# Altium PCB F1_Adapterboard.PcbDoc
Units mil, origin at the board's own origin, x right, y up, seen from the top; angles counter-clockwise.
Board outline 3725 x 3690 mil, 4 copper layers (Top Layer, Mid-Layer 1, Mid-Layer 2, Bottom Layer); 9 components, 93 nets, 198 pads, 8 vias.
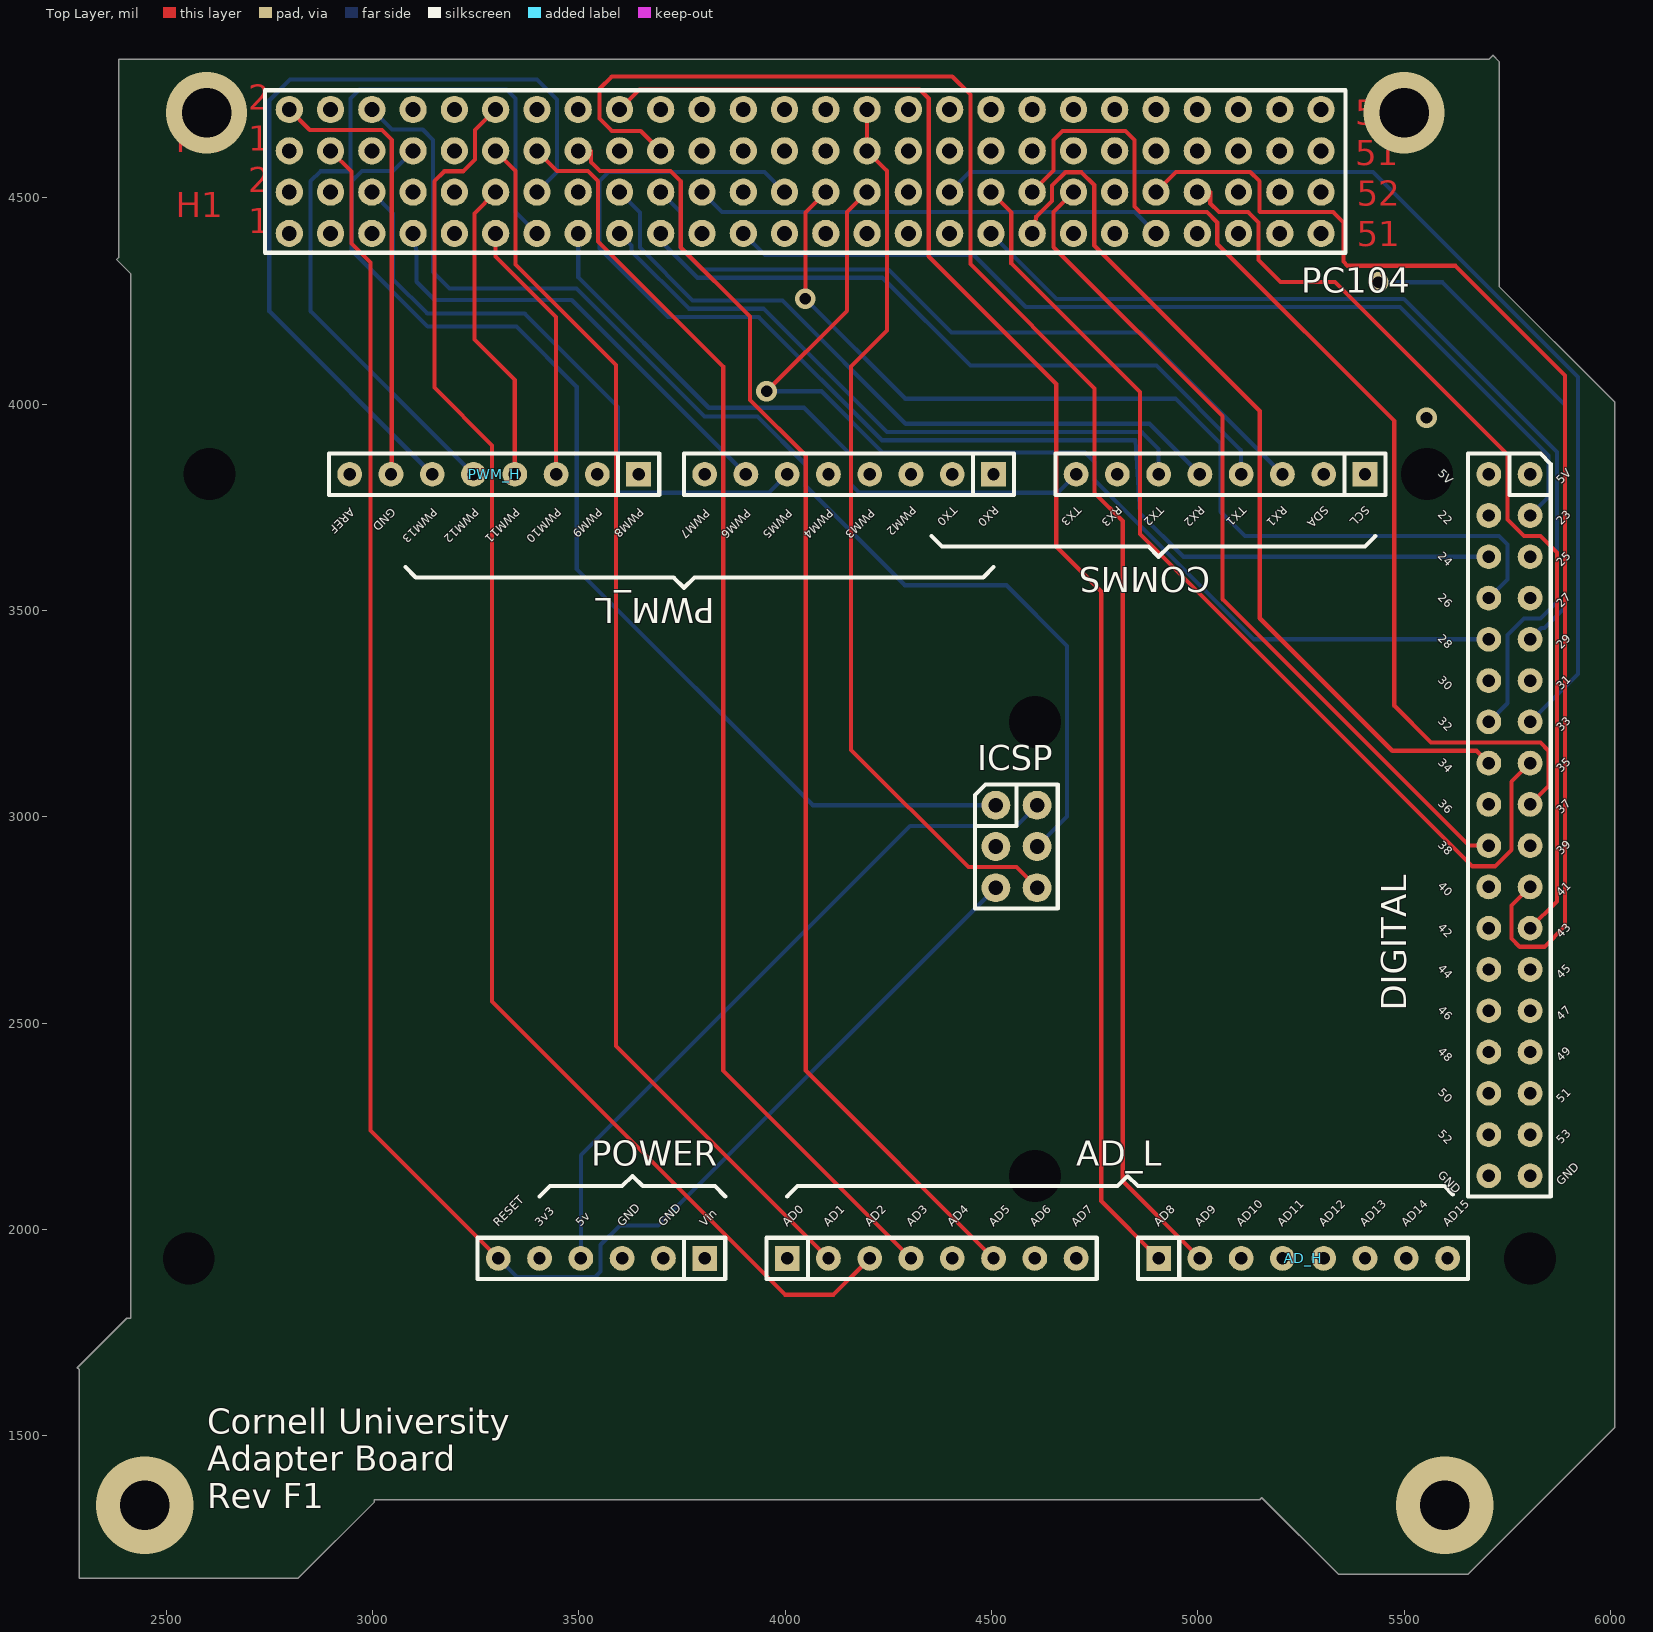
[diagram p0: Top Layer view]
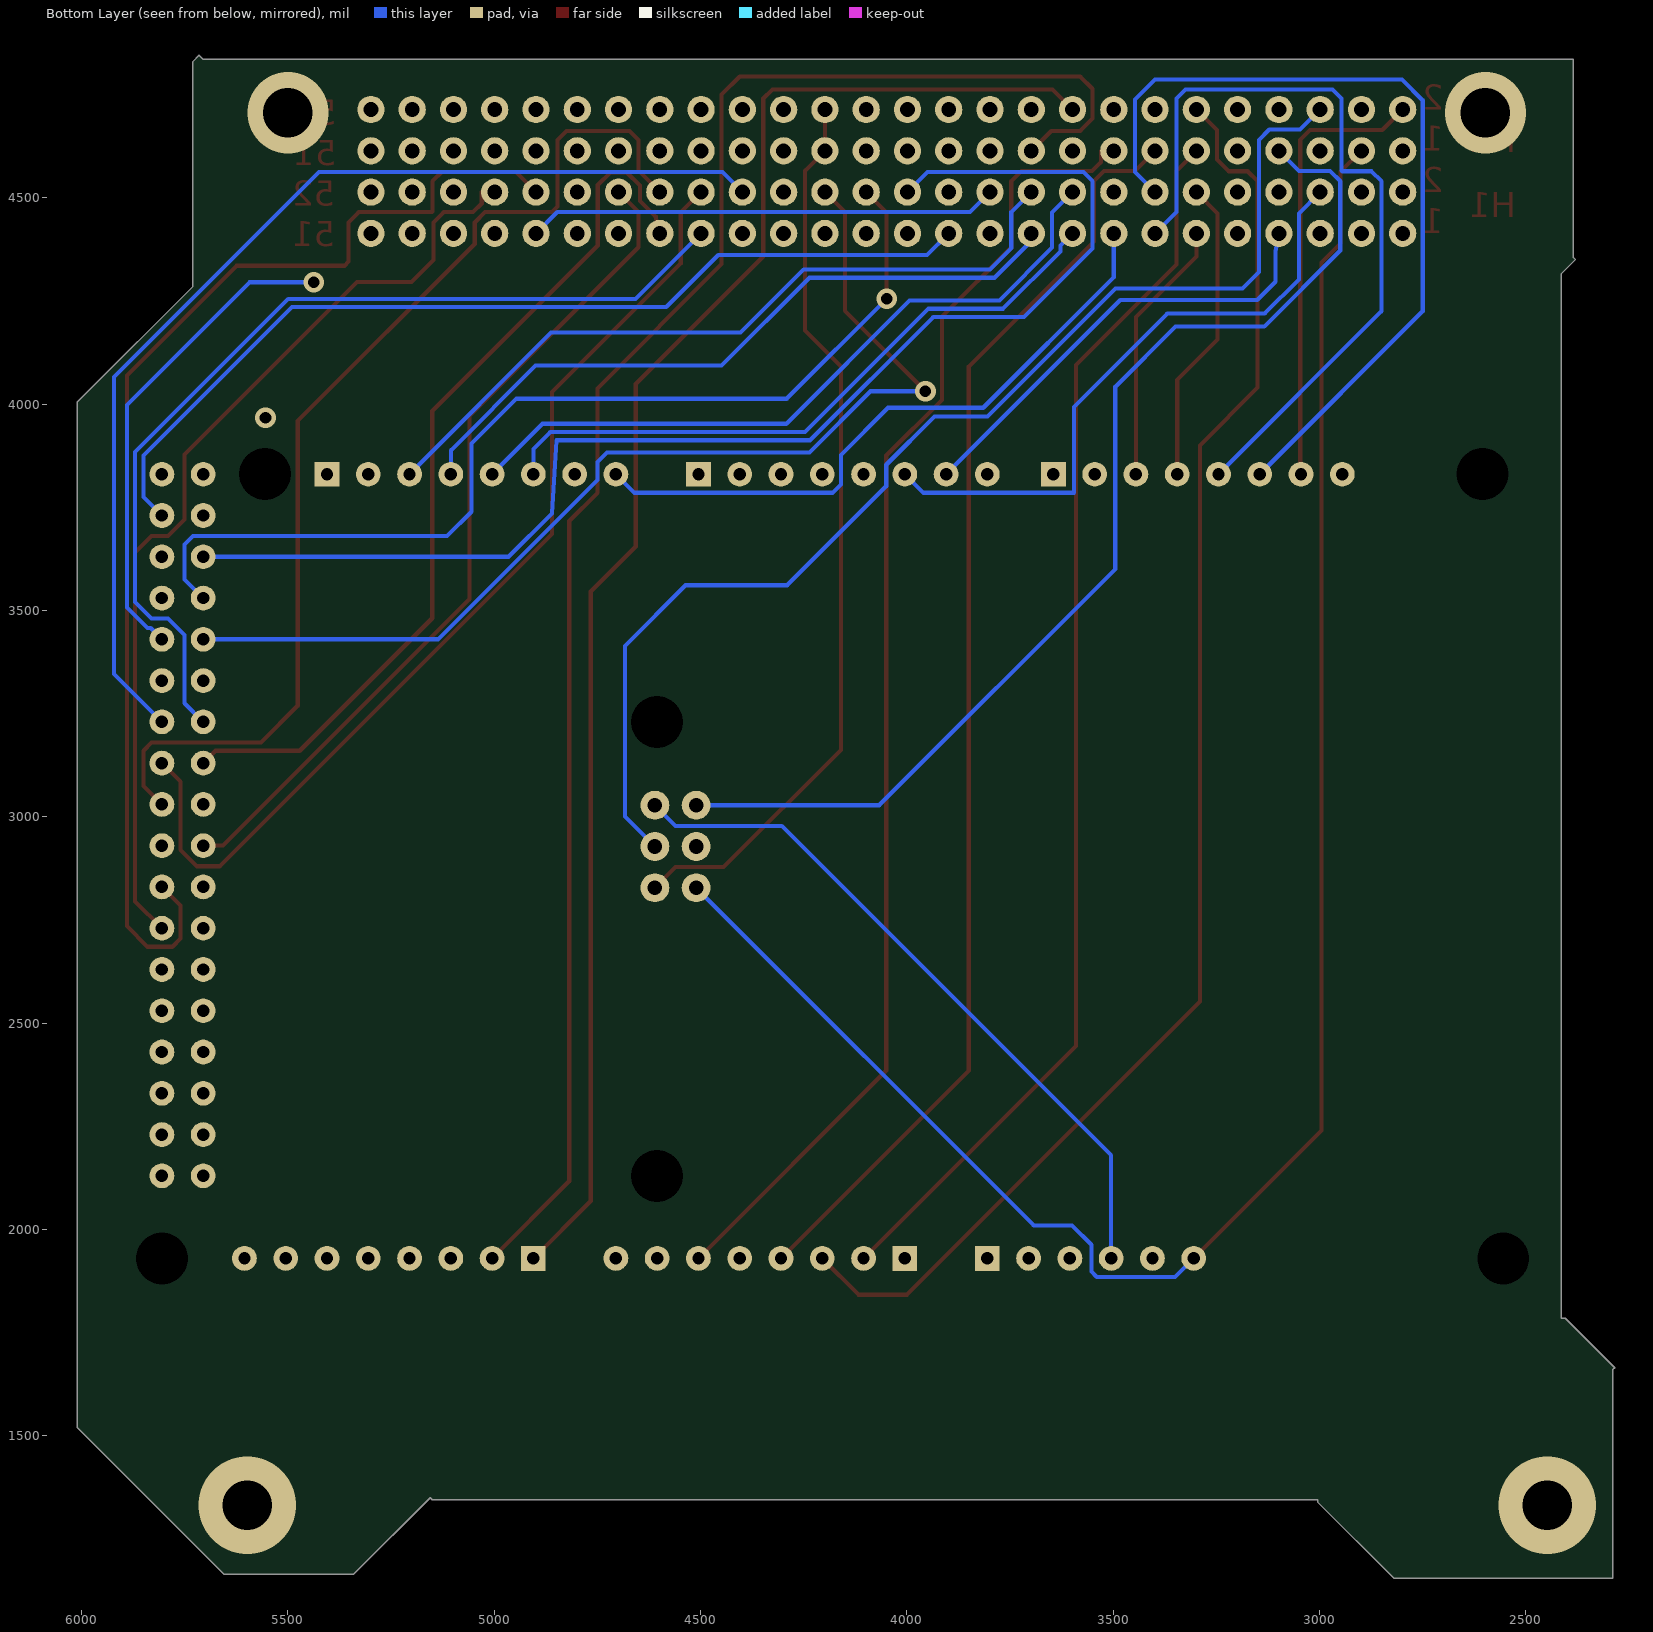
[diagram p1: Bottom Layer view, seen from below]
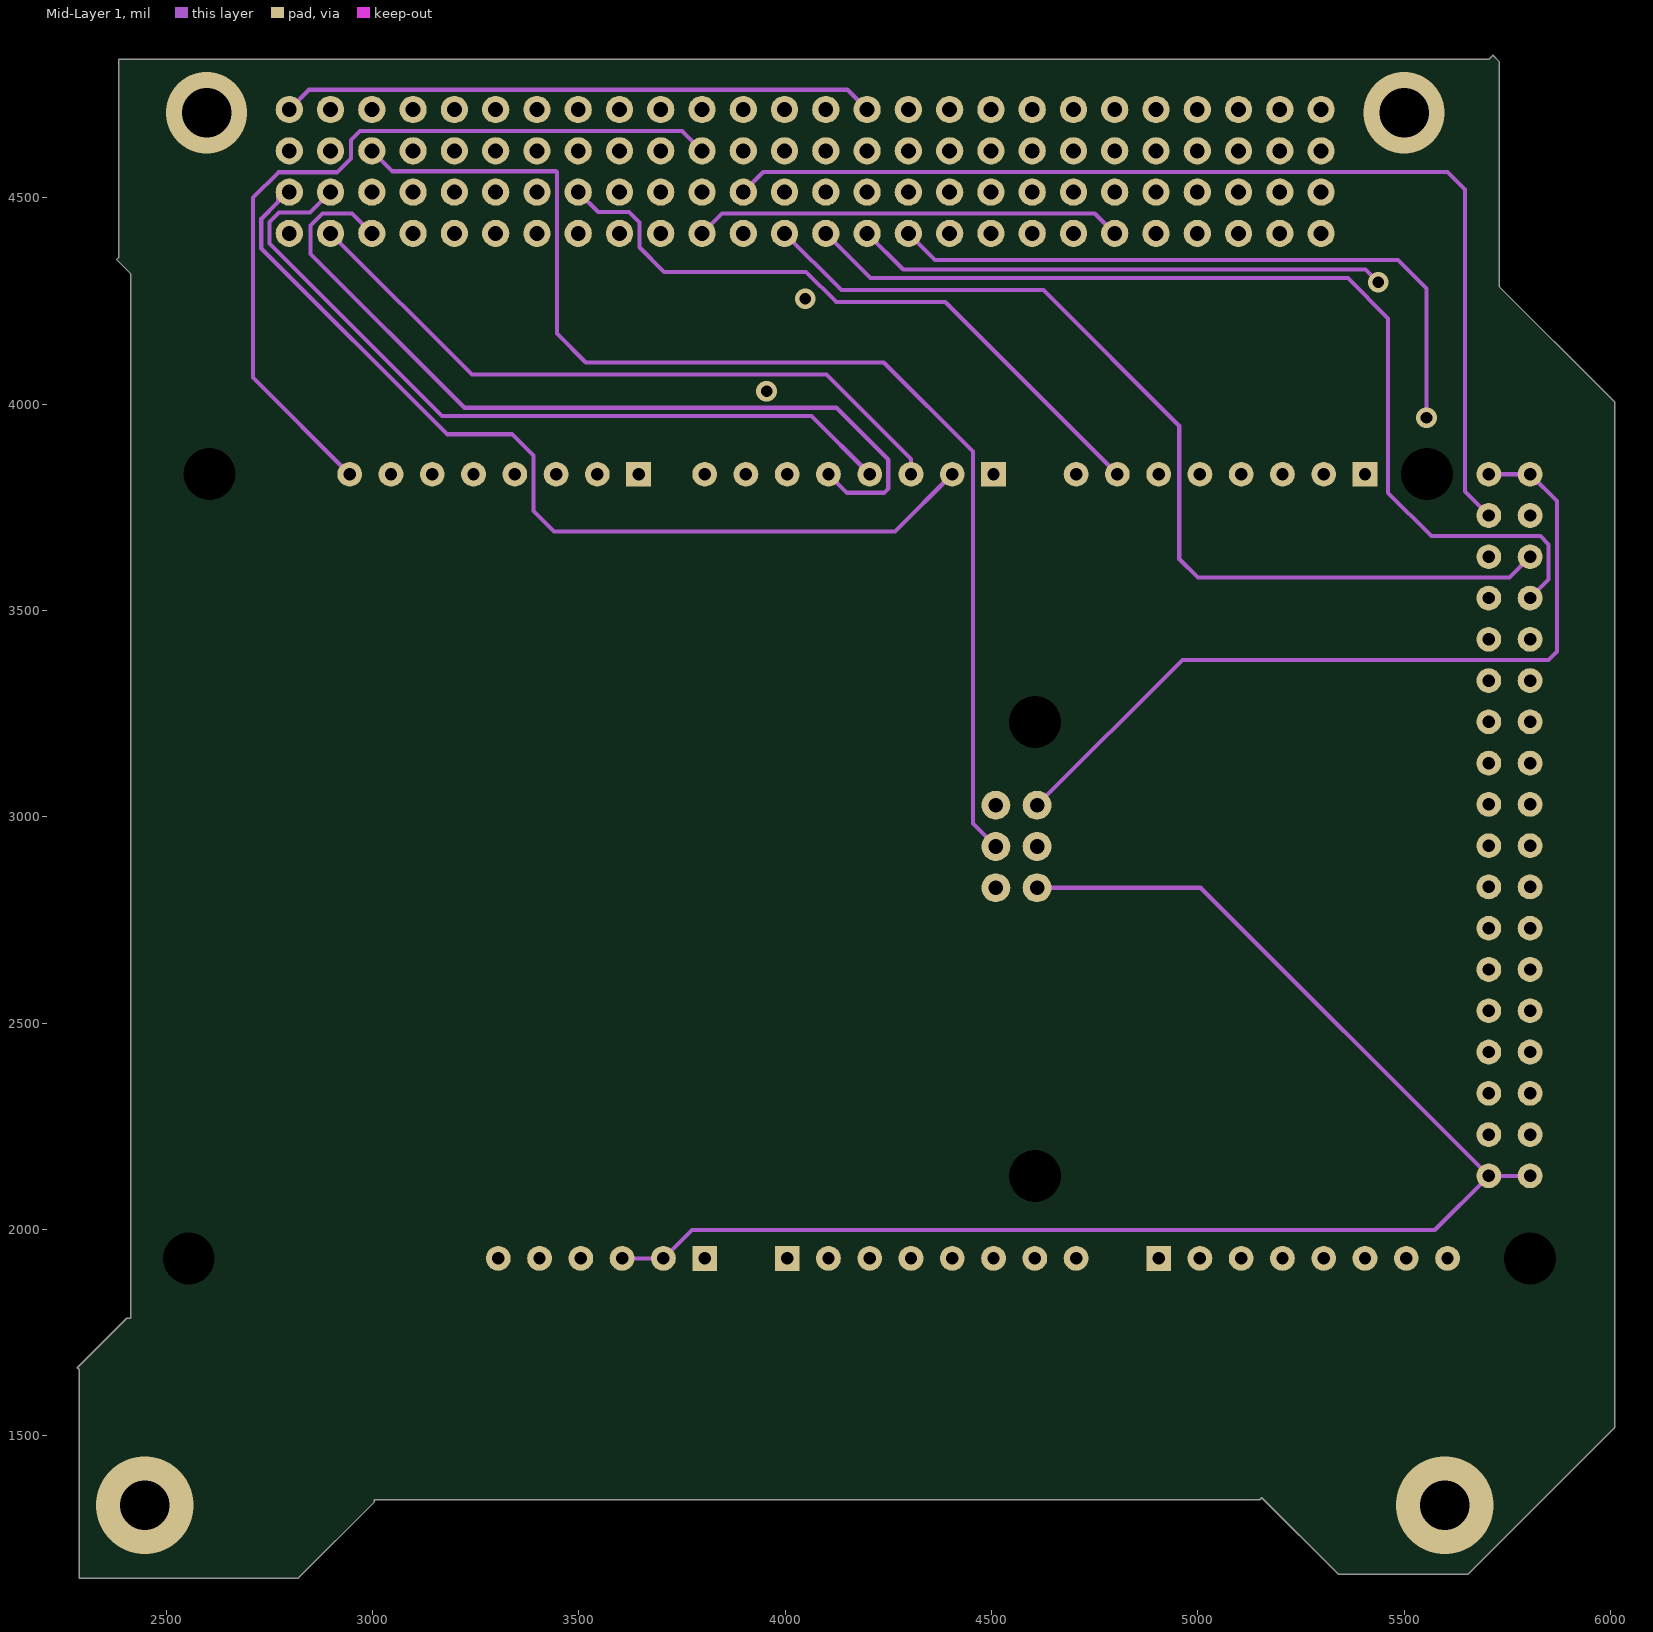
[diagram p2: Mid-Layer 1]
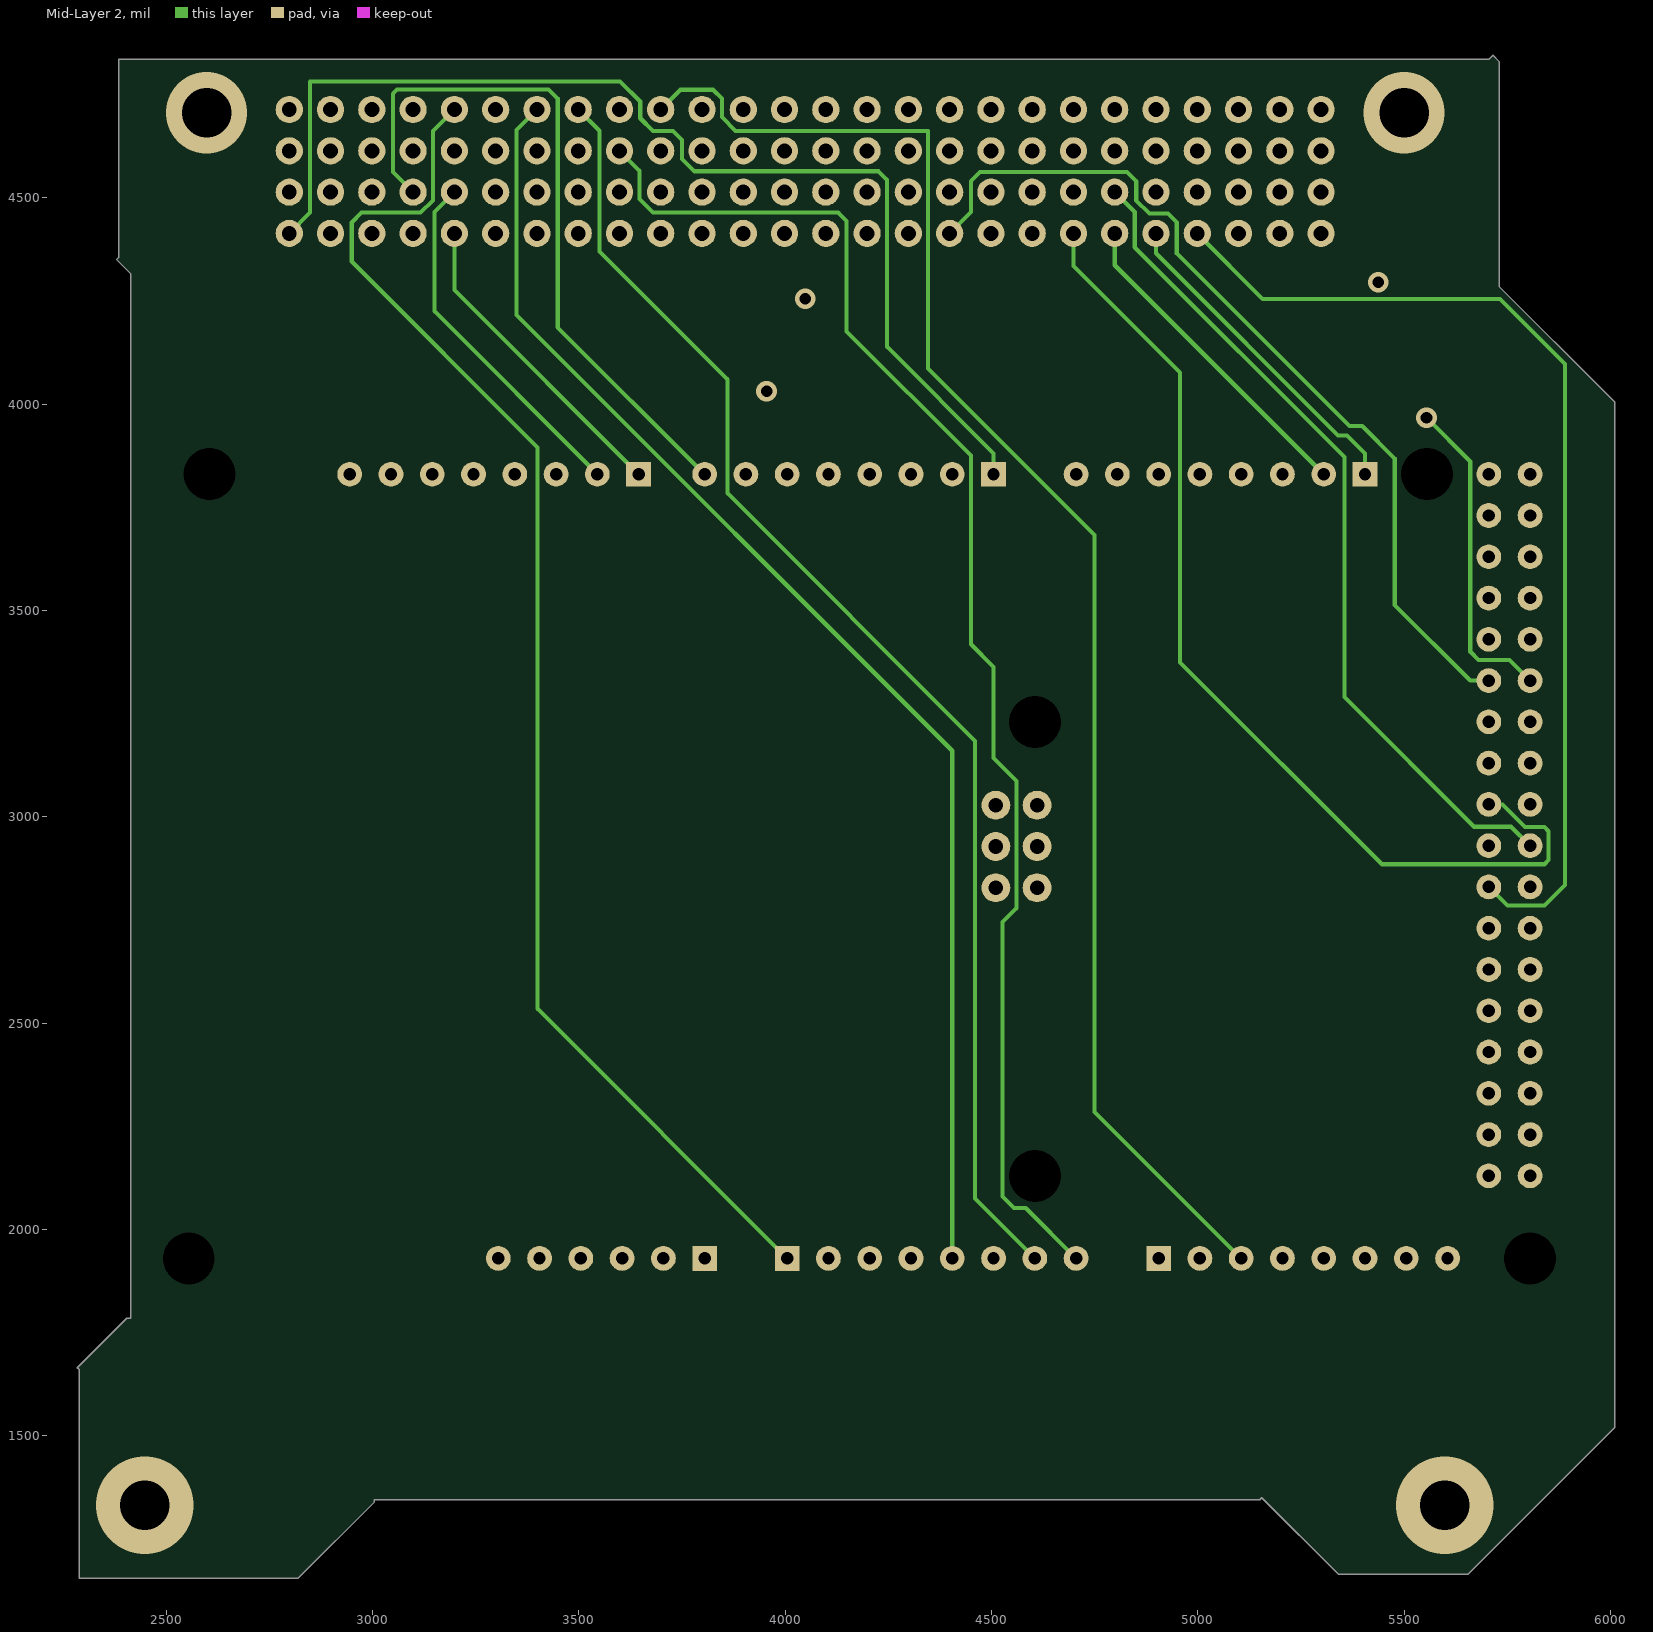
[diagram p3: Mid-Layer 2]
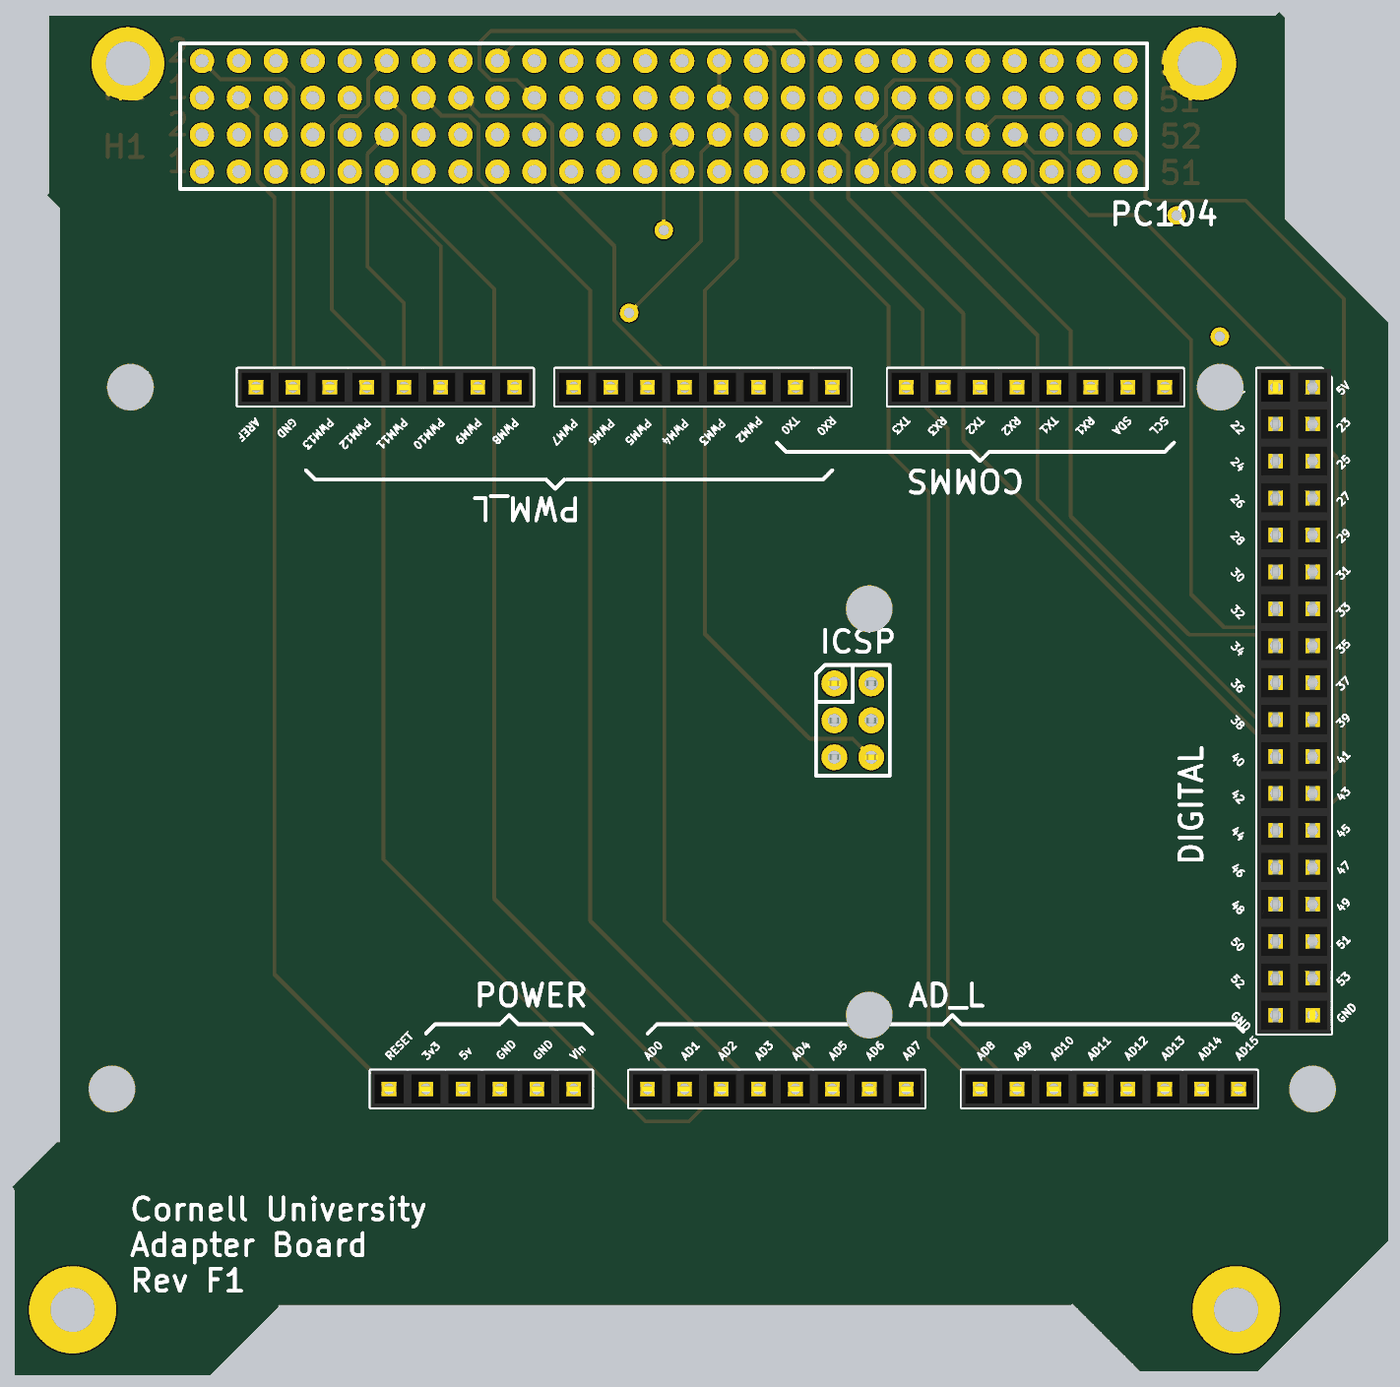
[diagram p4: 3D render of the assembled board from above, using the file's embedded part models]

## Layer stack, top to bottom
Top Solder: solder mask 0.4, Solder Resist, Dk 3.5
Top Layer: signal copper 1.4
Dielectric 1: dielectric 12.6, FR-4, Dk 4.8
Mid-Layer 1: signal copper 1.4
Dielectric2: dielectric 12.6, FR-4, Dk 4.8
Mid-Layer 2: signal copper 1.4
Dielectric3: dielectric 12.6, FR-4, Dk 4.8
Bottom Layer: signal copper 1.4
Bottom Solder: solder mask 0.4, Solder Resist, Dk 3.5

## Board outline
2385,4835 2385,4355 2380,4350 2415,4315 2415,1785 2405,1785 2285,1665 2290,1660 2290,1155 2820,1155 3005,1340 3005,1345 5150,1345 5155,1350 5340,1165 5350,1165 5655,1165 5660,1170 6010,1520 6010,1670 6010,4005 5995,4020 5730,4285 5730,4380 5730,4830 5715,4845 5705,4835 2390,4835

## Design rules (kind name [scope] priority, off if disabled: settings)
Clearance [All] p1: gap=10
PolygonConnect [All] p1: connectstyle=Relief reliefconductorwidth=10 reliefentries=4 polygonreliefangle="90 Angle" airgapwidth=10
RoutingVias [All] p1: holewidth=28 width=50 viastyle="Through Hole" minholewidth=28 minwidth=50 maxholewidth=28 maxwidth=50
SolderMaskExpansion [All] p1: expansion=4
Width [All] p1: maxlimit=10 minlimit=10 preferedwidth=10
30 further rules are at their usual default settings.

## Components (designator, comment, footprint, x,y, rotation, side; value= is the part's Value field where it differs from the comment)
AD_H "AD_H" "Header 8x1 8.5mm" 4905,1930 r0 top locked
AD_L "AD_L" "Header 8x1 8.5mm" 4005,1930 r0 top locked
COMMS "Communication" "Header 8x1 8.5mm" 5405,3830 r180 top
DIGITAL "IO_36" "HEADER 36X 8MM" 5805,3830 r270 top locked
ICSP "ICSP" ICSP 4510.51,3028.03 r0 top locked
PC104 "PC-104" PC-104FOOTPRINT 2798.61,4413.55 r0 top
POWER "POWER" "Header 6x1 8.5mm" 3805,1930 r180 top locked
PWM_H "PWM_H" "Header 8x1 8.5mm" 3645,3830 r180 top locked
PWM_L "PWM_L" "Header 8x1 8.5mm" 4505,3830 r180 top locked

## Footprints (in the part's own frame and the unit in brackets; to place one, negate y for a bottom-side part, rotate by r counter-clockwise, add the part's x,y. Pads: shape width x height; smd on the part's side, far side on the other; paste and mask are expansions set on the pad)
"Header 6x1 8.5mm" [mil] "Stackable 6 pin header"
  rect 60x60 hole 30: 1(0,0)
  round 60 hole 30: 2(100,0) 3(200,0) 4(300,0) 5(400,0) 6(500,0)
  silkscreen extent -50,-50 550,50, body extent -50,-50 550,50, height 335
"Header 8x1 8.5mm" [mil] "Stackable 8 pin header"
  rect 60x60 hole 30: 1(0,0)
  round 60 hole 30: 2(100,0) 3(200,0) 4(300,0) 5(400,0) 6(500,0) 7(600,0) 8(700,0)
  silkscreen extent -50,-50 750,50, body extent -50,-50 750,50, height 335
"HEADER 36X 8MM" [mil] "Stackable 10 pin header"
  round 60 hole 30: 1(0,0) 2(0,-100) 3(100,0) 4(100,-100) 5(200,0) 6(200,-100) 7(300,0) 8(300,-100) 9(400,0) 10(400,-100) 11(500,0) 12(500,-100) 13(600,0) 14(600,-100) 15(700,0) 16(700,-100) 17(800,0) 18(800,-100) 19(900,-100) 20(900,0) 21(1000,0) 22(1000,-100) 23(1100,0) 24(1100,-100) 25(1200,0) 26(1200,-100) 27(1300,0) 28(1300,-100) 29(1400,0) 30(1400,-100) 31(1500,0) 32(1500,-100) 33(1600,0) 34(1600,-100) 35(1700,0) 36(1700,-100)
  silkscreen extent -50,-150 1750,50, body extent -50,-150 1750,50, height 335
ICSP [mil]
  round 70 hole 35.43: 1(0,0) 2(100,0) 3(0,-100) 4(100,-100) 5(0,-200) 6(100,-200)
  silkscreen extent -50,-250 150,50, body extent -50,-250 150,50, height 485
PC-104FOOTPRINT [mil] "ESQ-126-14-G-D"
  round 65.98 hole 35.98 mask+2.99: H1_1(0,0) H1_2(0,100) H1_3(100,0) H1_4(100,100) H1_5(200,0) H1_6(200,100) H1_7(300,0) H1_8(300,100) H1_9(400,0) H1_10(400,100) H1_11(500,0) H1_12(500,100) H1_13(600,0) H1_14(600,100) H1_15(700,0) H1_16(700,100) H1_17(800,0) H1_18(800,100) H1_19(900,0) H1_20(900,100) H1_21(1000,0) H1_22(1000,100) H1_23(1100,0) H1_24(1100,100) H1_25(1200,0) H1_26(1200,100) H1_27(1300,0) H1_28(1300,100) H1_29(1400,0) H1_30(1400,100) H1_31(1500,0) H1_32(1500,100) H1_33(1600,0) H1_34(1600,100) H1_35(1700,0) H1_36(1700,100) H1_37(1800,0) H1_38(1800,100) H1_39(1900,0) H1_40(1900,100) H1_41(2000,0) H1_42(2000,100) H1_43(2100,0) H1_44(2100,100) H1_45(2200,0) H1_46(2200,100) H1_47(2300,0) H1_48(2300,100) H1_49(2400,0) H1_50(2400,100) H1_51(2500,0) H1_52(2500,100) H2_1(0,200) H2_2(0,300) H2_3(100,200) H2_4(100,300) H2_5(200,200) H2_6(200,300) H2_7(300,200) H2_8(300,300) H2_9(400,200) H2_10(400,300) H2_11(500,200) H2_12(500,300) H2_13(600,200) H2_14(600,300) H2_15(700,200) H2_16(700,300) H2_17(800,200) H2_18(800,300) H2_19(900,200) H2_20(900,300) H2_21(1000,200) H2_22(1000,300) H2_23(1100,200) H2_24(1100,300) H2_25(1200,200) H2_26(1200,300) H2_27(1300,200) H2_28(1300,300) H2_29(1400,200) H2_30(1400,300) H2_31(1500,200) H2_32(1500,300) H2_33(1600,200) H2_34(1600,300) H2_35(1700,200) H2_36(1700,300) H2_37(1800,200) H2_38(1800,300) H2_39(1900,200) H2_40(1900,300) H2_41(2000,200) H2_42(2000,300) H2_43(2100,200) H2_44(2100,300) H2_45(2200,200) H2_46(2200,300) H2_47(2300,200) H2_48(2300,300) H2_49(2400,200) H2_50(2400,300) H2_51(2500,200) H2_52(2500,300)
  silkscreen extent -59,-47 2559,347

## Free pads (board coordinates)
  round 62.99 hole 125.98: 0(2555,1930) 0(2605,3830) 0(4605,2130) 0(4605,3230) 0(5555,3830) 0(5805,1930)

## Via types
v1: diameter 50, hole 28, Top Layer to Bottom Layer, 4 vias
v2: diameter 196.85, hole 120, Top Layer to Bottom Layer, 2 vias
v3: diameter 236.22, hole 120, Top Layer to Bottom Layer, 2 vias

## Nets (pads, with @x,y where several pads share a name; then routed paths per layer and width w, separated by ;. In a path a pad name is that pad's centre, name@x,y a point inside that pad or via, vN(x,y) a via of type N, cw(c..) or ccw(c..) an arc to the next point about the centre after c; other vN are vias at no path point)
3V3: POWER.5
3V3_1: PC104.H2_27
3V3_2: PC104.H2_28
3V3_3: PC104.H1_52
5V: DIGITAL.1 DIGITAL.2 ICSP.2 POWER.4 | length 3677.3
  Mid-Layer 1 w10: ICSP.2 4962.48,3380 5850,3380 5870,3400 5870,3765 DIGITAL.1 DIGITAL.2
  Bottom Layer w10: POWER.4 3505,2180 4303.03,2978.03 4560.51,2978.03 ICSP.2
5V_1: PC104.H2_25
5V_2: PC104.H2_26
5V_3: PC104.H1_47
5V_4: PC104.H1_48
5V_5: PC104.H1_49
5V_6: PC104.H1_50
5V_7: PC104.H1_51
5V_IN: PC104.H1_32
AD0: AD_L.1 PC104.H2_10 | length 3407.3
  Mid-Layer 2 w10: PC104.H2_10 3146.6,4661.55 3146.6,4493.67 3116.93,4464 2974,4464 2950,4440 2950,4345 3400,3895 3400,2535 AD_L.1
AD1: AD_L.2 PC104.H2_11 | length 3017.6
  Top Layer w10: PC104.H2_11 3347,4565.16 3347,4338 3590,4095 3590,2445 AD_L.2
AD2: AD_L.3 PC104.H2_12 | length 3553.6
  Top Layer w10: PC104.H2_12 3249,4663.94 3249,4593 3220,4564 3174,4564 3150,4540 3150,4040 3290,3900 3290,2552 4000,1842 4117,1842 AD_L.3
AD3: AD_L.4 PC104.H2_13 | length 3102.8
  Top Layer w10: PC104.H2_13 3447.16,4565 3522,4565 3547,4540 3547,4394 3850,4091 3850,2385 AD_L.4
AD4: AD_L.5 PC104.H2_14 | length 3241.5
  Mid-Layer 2 w10: PC104.H2_14 3349,4663.94 3349,4216 4405,3160 AD_L.5
AD5: AD_L.6 PC104.H2_15 | length 3219
  Top Layer w10: PC104.H2_15 3530,4613.55 3530,4586 3551,4565 3722,4565 3747,4540 3747,4380 3915,4212 3915,4010 4050,3875 4050,2385 AD_L.6
AD6: AD_L.7 PC104.H2_16 | length 3241.8
  Mid-Layer 2 w10: PC104.H2_16 3550,4662.16 3550,4370 3860,4060 3860,3784 4460,3184 4460,2075 AD_L.7
AD7: AD_L.8 PC104.H2_17 | length 3448.8
  Mid-Layer 2 w10: PC104.H2_17 3647,4565.16 3647,4497 3680,4464 4128.61,4464 4149,4443.61 4149,4176 4450,3875 4450,3418 4505,3363 4505,3142.51 4560.51,3087 4560.51,2778.51 4527,2745 4527,2080 4555,2052 4583,2052 AD_L.8
AD8: AD_H.1 PC104.H2_18 | length 3819.3
  Top Layer w10: PC104.H2_18 3647.06,4762 4326,4762 4348,4740 4348,4358 4657,4049 4657,3655 4766,3546 4766,2069 AD_H.1
AD9: AD_H.2 PC104.H2_19 | length 4233.1
  Top Layer w10: PC104.H2_19 3650.16,4662 3580,4662 3550,4692 3550,4764 3580,4794 4405,4794 4449,4750 4449,4339 4750,4038 4750,3785 4818,3717 4818,2117 AD_H.2
AD10: AD_H.3 PC104.H2_20 | length 3781.1
  Mid-Layer 2 w10: PC104.H2_20 3746.6,4761.55 3825.06,4761.55 3846.6,4740 3846.6,4695.4 3880,4662 4346.15,4662 4346.6,4661.55 4346.6,4086.4 4750,3683 4750,2285 AD_H.3
AD11: AD_H.4
AD12: AD_H.5
AD13: AD_H.6
AD14: AD_H.7
AD15: AD_H.8
AGND: PC104.H2_31
AREF: PC104.H2_21 PWM_H.8 | length 1968.2
  Mid-Layer 1 w10: PWM_H.8 2710.62,4064.38 2710.62,4500 2772.16,4561.55 2914.48,4561.55 2948,4595.07 2948,4640 2969.55,4661.55 3750.62,4661.55 PC104.H2_21
GND: DIGITAL.35 DIGITAL.36 ICSP.6 PC104.H2_2 PC104.H2_29 PC104.H2_30 POWER.2 POWER.3 PWM_H.7 | length 8393.6
  Top Layer w10: PC104.H2_2 2848.16,4664 3023,4664 3047,4640 3047,3830 PWM_H.7 ; PC104.H2_30 PC104.H2_29 4247,4565.16 4247,4178 4160,4091 4160,3162 4443.97,2878.03 4560.51,2878.03 ICSP.6
  Mid-Layer 1 w10: PC104.H2_2 2846.6,4761.55 4150.62,4761.55 PC104.H2_30 ; POWER.3 POWER.2 3774,1999 5574,1999 DIGITAL.36 ; ICSP.6 5006.97,2828.03 DIGITAL.36 ; DIGITAL.35 DIGITAL.36
IO22: DIGITAL.3 PC104.H1_23 | length 2338.1
  Bottom Layer w10: PC104.H1_23 3951.16,4361 4457,4361 4583,4235 5490,4235 5850,3875 5850,3775 DIGITAL.3
IO23: DIGITAL.4 PC104.H1_24 | length 2599.9
  Mid-Layer 1 w10: PC104.H1_24 3947.06,4562 5605,4562 5647,4520 5647,3788 DIGITAL.4
IO24: DIGITAL.5 PC104.H1_25 | length 2361
  Mid-Layer 1 w10: PC104.H1_25 4136.16,4276 4626,4276 4955,3947 4955,3625 5000,3580 5755,3580 DIGITAL.5
IO25: DIGITAL.6 PC104.H1_26 | length 3198.1
  Bottom Layer w10: PC104.H1_26 3950.16,4562 3572,4562 3550,4540 3550,4377 3715.97,4211.03 3935.97,4211.03 4234.7,3912.3 4848.7,3912.3 4860,3735 4965,3630 DIGITAL.6
IO26: DIGITAL.7 PC104.H1_27 | length 2459.7
  Mid-Layer 1 w10: PC104.H1_27 4207.16,4305 5363.52,4305 5461,4207.52 5461,3785 5566,3680 5830,3680 5850,3660 5850,3575 DIGITAL.7
IO27: DIGITAL.8 PC104.H1_28 | length 2471.9
  Top Layer w10: v1(4049,4255) 4049,4463.94 PC104.H1_28
  Bottom Layer w10: v1(4049,4255) 4291,4013 4946,4013 5055,3904 5055,3739 5114,3680 5730,3680 5750,3660 5750,3575 DIGITAL.8
IO28: DIGITAL.9 PC104.H1_29 | length 2471.4
  Mid-Layer 1 w10: PC104.H1_29 4286.16,4326 5406,4326 v1(5437,4295)
  Bottom Layer w10: v1(5437,4295) 5593,4295 5890,3998 5890,3507 5840,3457 5832,3457 DIGITAL.9
IO29: DIGITAL.10 PC104.H1_30 | length 2608.2
  Top Layer w10: v1(3955,4031) 4150,4226 4150,4464.94 PC104.H1_30
  Bottom Layer w10: v1(3955,4031) 4087.71,4031 4235.71,3883 4727,3883 4750,3860 4750,3816 5136,3430 DIGITAL.10
IO30: DIGITAL.11 PC104.H1_31 | length 2408.6
  Mid-Layer 1 w10: PC104.H1_31 4363.18,4348.98 5485.02,4348.98 5554,4280 v1(5554,3967)
  Mid-Layer 2 w10: v1(5554,3967) 5660,3861 5660,3400 5680,3380 5755,3380 DIGITAL.11
IO31: DIGITAL.12 PC104.H1_33 | length 2201.2
  Mid-Layer 2 w10: PC104.H1_33 4450,4464.94 4450,4540 4472,4562 4828.62,4562 4850.62,4540 4850.62,4493.67 4882.74,4461.55 4927.45,4461.55 4949,4440 4949,4365 5367.28,3946.72 5398.28,3946.72 5477,3868 5477,3513 5660,3330 DIGITAL.12
IO32: DIGITAL.13 PC104.H1_34 | length 2631.8
  Bottom Layer w10: PC104.H1_34 4447.06,4562 5424.71,4562 5921,4065.71 5921,3346 DIGITAL.13
IO33: DIGITAL.14 PC104.H1_35 | length 2336.5
  Bottom Layer w10: PC104.H1_35 4657.16,4255 5499,4255 5870,3884 5870,3520 5830,3480 5790,3480 5750,3440 5750,3275 DIGITAL.14
IO34: DIGITAL.15 PC104.H1_36 | length 2456.9
  Top Layer w10: PC104.H1_36 4548,4464.16 4548,4341 4860,4029 4860,3685 5665,2880 5720,2880 5760,2920 5760,3085 DIGITAL.15
IO35: DIGITAL.16 PC104.H1_37 | length 2177.7
  Top Layer w10: PC104.H1_37 4608.61,4454.17 4646.6,4492.16 4646.6,4529.42 4678.73,4561.55 4718.49,4561.55 4749,4531.04 4749,4384 5150,3983 5150,3481 5471,3160 5675,3160 DIGITAL.16
IO36: DIGITAL.17 PC104.H1_38 | length 2656.2
  Top Layer w10: PC104.H1_38 4650.62,4565.56 4650.62,4640 4672.16,4661.55 4825.06,4661.55 4846.6,4640 4846.6,4478.4 4860,4465 5022,4465 5047,4440 5047,4388 5476,3959 5476,3269 5565,3180 5830,3180 5850,3160 5850,3075 DIGITAL.17
IO37: DIGITAL.18 PC104.H1_39 | length 2488.2
  Mid-Layer 2 w10: PC104.H1_39 4698.61,4334.39 4957,4076 4957,3374 5446,2885 5840,2885 5850,2895 5850,2965 5840,2975 5793,2975 5738,3030 DIGITAL.18
IO38: DIGITAL.19 PC104.H1_40 | length 2068.2
  Top Layer w10: PC104.H1_40 4650.62,4465.56 4650.62,4380 5060,3970.62 5060,3527.18 5657.18,2930 DIGITAL.19
IO39: DIGITAL.20 PC104.H1_42 | length 2053.1
  Mid-Layer 2 w10: PC104.H1_42 4847.16,4465 4847.16,4379.84 5355,3872 5355,3290 5669.11,2975.89 5759.11,2975.89 DIGITAL.20
IO40: DIGITAL.21 PC104.H1_44 | length 2950.7
  Top Layer w10: PC104.H1_44 4947.06,4562 5127,4562 5149,4540 5149,4467 5151,4465 5328,4465 5353,4440 5353,4345 5363,4335 5624,4335 5890,4069 5890,2735 5840,2685 5780,2685 5760,2705 5760,2785 DIGITAL.21
IO41: DIGITAL.22 PC104.H1_45 | length 2508.7
  Mid-Layer 2 w10: PC104.H1_45 5157.16,4255 5731.71,4255 5890,4096.71 5890,2835 5840,2785 5750,2785 DIGITAL.22
IO42: DIGITAL.23 PC104.H1_46 | length 2332.2
  Top Layer w10: PC104.H1_46 5030,4513.55 5030,4486 5051,4465 5122,4465 5147,4440 5147,4349 5200,4296 5332,4296 5750,3878 5750,3720 5790,3680 5830,3680 5870,3640 5870,2795 DIGITAL.23
IO43: DIGITAL.24
IO44: DIGITAL.25
IO45: DIGITAL.26
IO46: DIGITAL.27
IO47: DIGITAL.28
IO48: DIGITAL.29
IO49: DIGITAL.30
IO50: DIGITAL.31
IO51: DIGITAL.32
IO52: DIGITAL.33
IO53: DIGITAL.34
MISO: ICSP.1 PC104.H2_7 | length 2723.2
  Bottom Layer w10: PC104.H2_7 3050.06,4565 2975,4565 2950,4540 2950,4372 3134,4188 3349,4188 3495,4042 3495,3600.03 4067,3028.03 ICSP.1
MOSI: ICSP.4 PC104.H2_6 | length 2956.6
  Bottom Layer w10: PC104.H2_6 3047.16,4665 3122,4665 3147,4640 3147,4320 3187,4280 3494.17,4280 3804.45,3969.72 3933.28,3969.72 4050,3853 4050,3801 4290,3561 4536,3561 4683,3414 4683,3000.52 ICSP.4
NETLABEL82: PC104.H2_1
NETLABEL85: PC104.H2_4
PWM2: PC104.H1_3 PWM_L.3 | length 1669.7
  Mid-Layer 1 w10: PC104.H1_3 3240.97,4071.19 4100.66,4071.19 4305,3866.85 PWM_L.3
PWM3: PC104.H1_4 PWM_L.4 | length 1915.5
  Mid-Layer 1 w10: PC104.H1_4 2849.06,4464 2774,4464 2750.62,4440.62 2750.62,4389.38 3169,3971 4064,3971 PWM_L.4
PWM4: PC104.H1_5 PWM_L.5 | length 2094.1
  Mid-Layer 1 w10: PC104.H1_5 2950.16,4462 2879.18,4462 2850,4432.82 2850,4364 3223,3991 4124,3991 4250,3865 4250,3795 4240,3785 4150,3785 PWM_L.5
PWM5: PC104.H1_6 PWM_L.6 | length 1542.5
  Bottom Layer w10: PC104.H1_6 3050,4462.16 3050,4302 3133,4219 3369,4219 3595,3993 3595,3785 3960,3785 PWM_L.6
PWM6: PC104.H1_7 PWM_L.7 | length 1109.5
  Bottom Layer w10: PC104.H1_7 3106.63,4370.37 3106.63,4296.37 3151,4252 3483,4252 PWM_L.7
PWM7: PC104.H1_8 PWM_L.8 | length 1728.3
  Mid-Layer 2 w10: PC104.H1_8 3050,4562.16 3050,4752 3060,4762 3427,4762 3449,4740 3449,4186 PWM_L.8
PWM8: PC104.H1_9 PWM_H.1 | length 768.5
  Mid-Layer 2 w10: PC104.H1_9 3198.61,4276.39 PWM_H.1
PWM9: PC104.H1_10 PWM_H.2 | length 867.3
  Mid-Layer 2 w10: PC104.H1_10 3150,4464.94 3150,4225 PWM_H.2
PWM10: PC104.H1_11 PWM_H.3 | length 644.2
  Top Layer w10: PC104.H1_11 3298.61,4357.39 3445,4211 PWM_H.3
PWM11: PC104.H1_12 PWM_H.4 | length 745.5
  Top Layer w10: PC104.H1_12 3247,4461.94 3247,4156 3345,4058 PWM_H.4
PWM12: PC104.H1_13 PWM_H.5 | length 1921.4
  Bottom Layer w10: PWM_H.5 2850,4225 2850,4540 2874,4564 2945,4564 2947,4566 2947,4740 2969,4762 3325,4762 3347,4740 3347,4465.16 PC104.H1_13
PWM13: PC104.H1_14 PWM_H.6 | length 2051.7
  Bottom Layer w10: PWM_H.6 2750,4225 2750,4736 2800,4786 3399,4786 3447,4738 3447,4561.94 PC104.H1_14
RESET: ICSP.5 PC104.H2_3 POWER.6 | length 4504.7
  Top Layer w10: PC104.H2_3 2949,4563.16 2949,4389 2995,4343 2995,2240 POWER.6
  Bottom Layer w10: POWER.6 3350,1885 3540,1885 3553,1898 3553,1963 3600,2010 3692.48,2010 ICSP.5
RX0: PC104.H1_1 PWM_L.1 | length 2756.2
  Mid-Layer 2 w10: PC104.H1_1 2849,4463.94 2849,4781 2850,4782 3600,4782 3649,4733 3649,4692.55 3680,4661.55 3728.45,4661.55 3750,4640 3750,4594 3780,4564 4226,4564 4246.6,4543.4 4246.6,4139 4505,3880.6 PWM_L.1
RX1: COMMS.3 PC104.H1_20 | length 1840.6
  Bottom Layer w10: PC104.H1_20 3747,4465.16 3747,4378 3799,4326 4250,4326 4403,4173 4862,4173 COMMS.3
RX2: COMMS.5 PC104.H1_18 | length 1739.4
  Bottom Layer w10: PC104.H1_18 3648,4464.16 3648,4379 3775.97,4251.03 3993.45,4251.03 4292.19,3952.3 4882.7,3952.3 COMMS.5
RX3: COMMS.7 PC104.H1_16 | length 1624.7
  Mid-Layer 1 w10: PC104.H1_16 3547.16,4465 3622,4465 3647,4440 3647,4380 3707,4320 4051,4320 4124,4247 4388,4247 COMMS.7
SCK: ICSP.3 PC104.H2_5 | length 2967.2
  Mid-Layer 1 w10: PC104.H2_5 3048.16,4564 3445,4564 3447,4562 3447,4171 3517,4101 4239,4101 4455,3885 4455,2983.54 ICSP.3
SCL: COMMS.1 PC104.H1_22 PC104.H1_43 | length 1947
  Mid-Layer 2 w10: PC104.H1_43 4898.61,4365.39 5340,3924 5361,3924 5405,3880 COMMS.1
  Bottom Layer w10: PC104.H1_22 3847.16,4465 4847.16,4465 PC104.H1_43
SDA: COMMS.2 PC104.H1_21 PC104.H1_41 | length 1833.4
  Mid-Layer 1 w10: PC104.H1_21 3847.06,4462 4750.16,4462 PC104.H1_41
  Mid-Layer 2 w10: PC104.H1_41 4798.61,4336.39 COMMS.2
TX0: PC104.H1_2 PWM_L.2 | length 2275.3
  Mid-Layer 1 w10: PC104.H1_2 2771,4513.55 2771,4489.29 2730.62,4448.9 2730.62,4377.38 3181,3927 3338,3927 3390,3875 3390,3741 3440,3691 4266,3691 PWM_L.2
TX1: COMMS.4 PC104.H1_19 | length 1692.7
  Bottom Layer w10: PC104.H1_19 3698.61,4395.39 3788,4306 4236,4306 4449,4093 4900,4093 5105,3888 COMMS.4
TX2: COMMS.6 PC104.H1_17 | length 1592.3
  Bottom Layer w10: PC104.H1_17 3628,4384.16 3628,4370 3766.97,4231.03 3947.97,4231.03 4246.7,3932.3 4864,3932.3 4905,3891.3 COMMS.6
TX3: COMMS.8 PC104.H1_15 | length 1589.7
  Bottom Layer w10: PC104.H1_15 3498.61,4307.39 3815,3991 4046,3991 4160,3877 4160,3805 4180,3785 4660,3785 COMMS.8
VIN: POWER.1
pads on no net: PC104.H2_8 PC104.H2_9 PC104.H2_22 PC104.H2_23 PC104.H2_24 PC104.H2_32 PC104.H2_33 PC104.H2_34 PC104.H2_35 PC104.H2_36 PC104.H2_37 PC104.H2_38 PC104.H2_39 PC104.H2_40 PC104.H2_41 PC104.H2_42 PC104.H2_43 PC104.H2_44 PC104.H2_45 PC104.H2_46 PC104.H2_47 PC104.H2_48 PC104.H2_49 PC104.H2_50 PC104.H2_51 PC104.H2_52
copper on no net:
  other v2: 2598.22,4706.07 5499.79,4706.07
  other v3: 2448.61,1332.06 5598.22,1332.06

## Other copper
Top Layer:
  text "Check about pads vs. holes for the arduino mounting" at 6160,3005 h60

## Silkscreen, mask and mechanical layers (free items; w line width, h text height)
Top Overlay:
  lines w10: 3080,3605 3105,3580 3730,3580 3755,3555 3780,3580 4480,3580 4505,3605 ; 3405,2080 3430,2105 3605,2105 3630,2130 3655,2105 3830,2105 3855,2080 ; 4005,2080 4030,2105 4805,2105 4830,2130 4855,2105 5597.93,2105 5617.7,2085.23 ; 4355,3680 4380,3655 4880,3655 4905,3630 4930,3655 5405,3655 5430,3680
  text "5V" at 5580,3830 h20 r315
  text "5V" at 5880,3805 h20 r45
  text "PWM2" at 4305,3755 h20 r225
  text "TX0" at 4405,3755 h20 r225
  text "RX0" at 4505,3755 h20 r225
  text "TX3" at 4705,3755 h20 r225
  text "RX3" at 4805,3755 h20 r225
  text "TX2" at 4905,3755 h20 r225
  text "RX2" at 5005,3755 h20 r225
  text "TX1" at 5105,3755 h20 r225
  text "RX1" at 5205,3755 h20 r225
  text "SDA" at 5305,3755 h20 r225
  text "SCL" at 5405,3755 h20 r225
  text "AREF" at 2945,3750 h20 r225
  text "GND" at 3045,3750 h20 r225
  text "PWM13" at 3145,3750 h20 r225
  text "PWM12" at 3245,3750 h20 r225
  text "PWM11" at 3345,3750 h20 r225
  text "PWM10" at 3445,3750 h20 r225
  text "PWM9" at 3545,3750 h20 r225
  text "PWM8" at 3645,3750 h20 r225
  text "PWM7" at 3805,3747.93 h20 r225
  text "PWM6" at 3905,3747.93 h20 r225
  text "PWM5" at 4005,3747.93 h20 r225
  text "PWM4" at 4105,3747.93 h20 r225
  text "PWM3" at 4205,3747.93 h20 r225
  text "22" at 5580,3730 h20 r315
  text "23" at 5880,3705 h20 r45
  text "24" at 5580,3630 h20 r315
  text "25" at 5880,3605 h20 r45
  text "26" at 5580,3530 h20 r315
  text "27" at 5880,3505 h20 r45
  text "28" at 5580,3430 h20 r315
  text "29" at 5880,3405 h20 r45
  text "30" at 5580,3330 h20 r315
  text "31" at 5880,3305 h20 r45
  text "32" at 5580,3230 h20 r315
  text "33" at 5880,3205 h20 r45
  text "34" at 5580,3130 h20 r315
  text "35" at 5880,3105 h20 r45
  text "36" at 5580,3030 h20 r315
  text "37" at 5880,3005 h20 r45
  text "38" at 5580,2930 h20 r315
  text "39" at 5880,2905 h20 r45
  text "40" at 5580,2830 h20 r315
  text "41" at 5880,2805 h20 r45
  text "42" at 5580,2730 h20 r315
  text "43" at 5880,2705 h20 r45
  text "44" at 5580,2630 h20 r315
  text "45" at 5880,2605 h20 r45
  text "46" at 5580,2530 h20 r315
  text "47" at 5880,2505 h20 r45
  text "48" at 5580,2430 h20 r315
  text "49" at 5880,2405 h20 r45
  text "50" at 5580,2330 h20 r315
  text "51" at 5880,2305 h20 r45
  text "52" at 5580,2230 h20 r315
  text "53" at 5880,2205 h20 r45
  text "GND" at 5580,2130 h20 r315
  text "GND" at 5880,2105 h20 r45
  text "RESET" at 3305,2005 h20 r45
  text "3v3" at 3405,2005 h20 r45
  text "5v" at 3505,2005 h20 r45
  text "GND" at 3605,2005 h20 r45
  text "GND" at 3705,2005 h20 r45
  text "Vin" at 3805,2005 h20 r45
  text "AD0" at 4005,2005 h20 r45
  text "AD1" at 4105,2005 h20 r45
  text "AD2" at 4205,2005 h20 r45
  text "AD3" at 4305,2005 h20 r45
  text "AD4" at 4405,2005 h20 r45
  text "AD5" at 4505,2005 h20 r45
  text "AD6" at 4605,2005 h20 r45
  text "AD7" at 4705,2005 h20 r45
  text "AD8" at 4905,2005 h20 r45
  text "AD9" at 5005,2005 h20 r45
  text "AD10" at 5105,2005 h20 r45
  text "AD11" at 5205,2005 h20 r45
  text "AD12" at 5305,2005 h20 r45
  text "AD13" at 5405,2005 h20 r45
  text "AD14" at 5505,2005 h20 r45
  text "AD15" at 5605,2005 h20 r45
  text "Cornell University / Adapter Board / Rev F1" at 2600,1325 h60
Mechanical 1:
  circle w5: c5805,1930 r62.99
  circle w5: c5555,3830 r62.99
  circle w5: c4605,3230 r62.99
  circle w5: c2555,1930 r62.99
  circle w5: c4605,2130 r62.99
  circle w5: c2605,3830 r62.99
  lines w5: 6005,1980 6005,3330
Mechanical 2:
  lines w10: 2415,4145 2415,4190 2425,4305 2390,4350 2382.58,4838.25 5723.43,4838.25 5728.29,4300.03 ; 2422.29,4203.51 2417.07,1789.25 2290,1670 2295,1160 2825,1160 3005,1350 5165,1350 5340,1170 5655,1170 5785,1310 6010,1525 6004.53,1765 ; 5720,4305 5998.71,4009.89 5998.71,3988.71 6005,3995 6005,1655

## Text inside footprints (layer, text, board x,y; h text height)
PC104: Mechanical 1 "J1" at 2898.61,4613.55 h30; Top Layer "H1" at 2523.02,4452.92 h60; Top Layer "H2" at 2523.02,4610.4 h60; Top Layer "1" at 2698.61,4413.55 h60; Top Layer "2" at 2698.61,4513.55 h60; Top Layer "1" at 2698.61,4613.55 h60; Top Layer "2" at 2698.61,4713.55 h60; Top Layer "51" at 5385.22,4382.05 h60; Top Layer "52" at 5385.22,4480.48 h60; Top Layer "51" at 5381.29,4578.9 h60; Top Layer "52" at 5381.29,4677.33 h60